# EAGLE board particle-can-v1.1 (EAGLE 7.5.0)
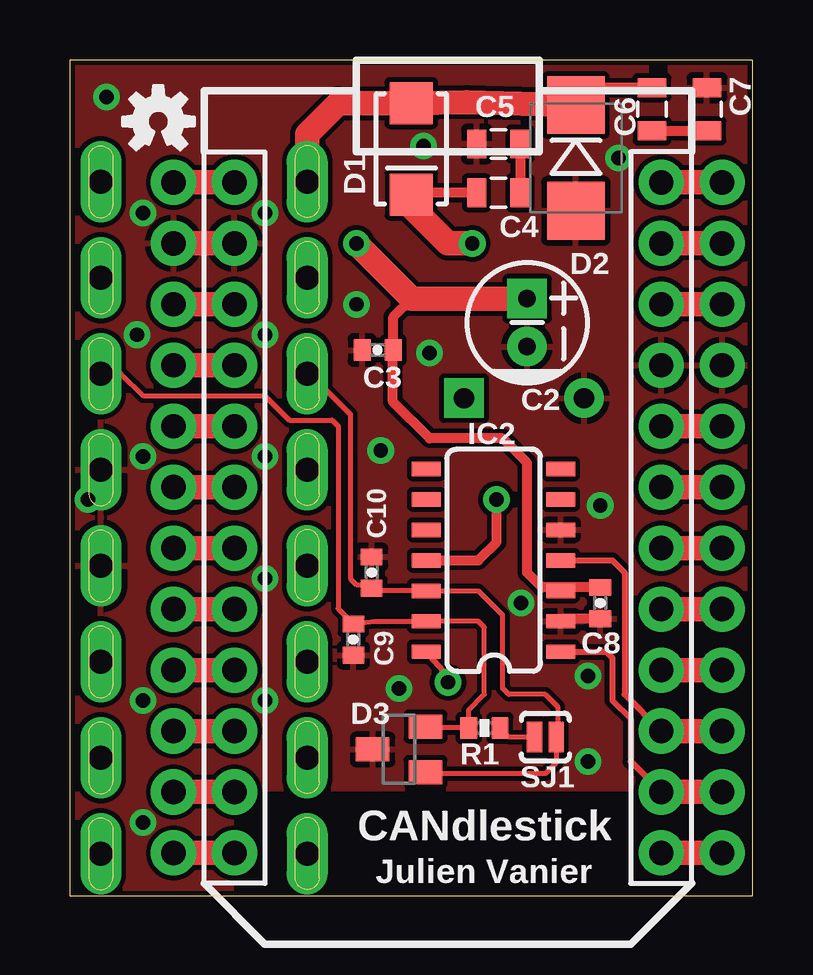
[diagram p0: board, top side]
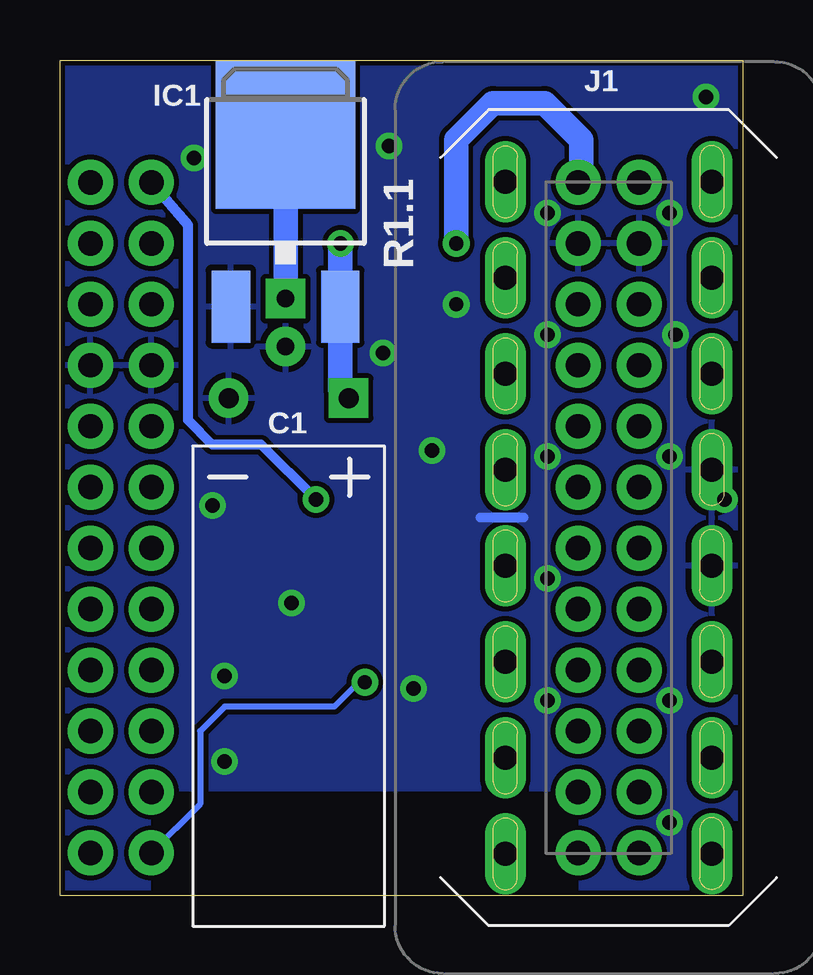
[diagram p1: board, bottom side, seen from below]

Size 28.45 x 34.8 mm. Coordinates in mm from the lower left corner, seen from the top.
Outline: 0,0 28.45,0 28.45,34.8 0,34.8 0,0
Copper layers (1*16): Top 0.035mm / dielectric 1.5mm / Bottom 0.035mm
Design rules "SparkFun *": minimum track width 8mil, minimum drill 20mil, track to track 8mil, track to pad 8mil, pad to pad 8mil, via to via 8mil, smd to smd 8mil, copper to edge 8mil, drill to drill 8mil, minimum pad ring 12mil, minimum via ring 10mil, stop-mask expansion 4mil, vias tented up to drill 45mil, thermal gap 10mil
tRestrict: area 24.1,34.3 to 24.9,34.8; area 6.9,0 to 24.6,4.3
bRestrict: area 6.9,0 to 24.6,4.3

## Footprints (pad centres in the part's own frame; a part is rotated, then mirrored left to right if it is on the bottom)
CPOL-8MMX20MM-FLAT = drill 0.838 pad 1.651: 1 2.5,0 | drill 0.838 pad 1.651 square: 2 -2.5,0
CPOL-5MMX2D = drill 0.737 pad 1.651 square: 1 -1,0 | drill 0.737 pad 1.651: 2 1,0
0402-CAP = smd 0.7 x 0.9: 1 -0.65,0; 2 0.65,0
0805 = smd 0.8 x 1.2: 1 -0.9,0; 2 0.9,0
SPARK_CORE_OUTSIDE = drill 1.016 pad 1.88: 1 -8.89,13.97; 2 -8.89,11.43; 3 -8.89,8.89; 4 -8.89,6.35; 5 -8.89,3.81; 6 -8.89,1.27; 7 -8.89,-1.27; 8 -8.89,-3.81; 9 -8.89,-6.35; 10 -8.89,-8.89; 11 -8.89,-11.43; 12 -8.89,-13.97; 13 8.89,-13.97; 14 8.89,-11.43; 15 8.89,-8.89; 16 8.89,-6.35; 17 8.89,-3.81; 18 8.89,-1.27; 19 8.89,1.27; 20 8.89,3.81; 21 8.89,6.35; 22 8.89,8.89; 23 8.89,11.43; 24 8.89,13.97; @1 -11.43,13.97; @2 -11.43,11.43; @3 -11.43,8.89; @4 -11.43,6.35; @5 -11.43,3.81; @6 -11.43,1.27; @7 -11.43,-1.27; @8 -11.43,-3.81; @9 -11.43,-6.35; @10 -11.43,-8.89; @11 -11.43,-11.43; @12 -11.43,-13.97; @13 11.43,-13.97; @14 11.43,-11.43; @15 11.43,-8.89; @16 11.43,-6.35; @17 11.43,-3.81; @18 11.43,-1.27; @19 11.43,1.27; @20 11.43,3.81; @21 11.43,6.35; @22 11.43,8.89; @23 11.43,11.43; @24 11.43,13.97
SMA-DIODE = smd 1.75 x 1.8: A -1.91,0; C 1.91,0
SMB-DIODE = smd 2.4 x 2.4: A 2.2,0; C -2.2,0
SOT23 = smd 1 x 1.4: 1 -0.95,-1.1; 2 0.95,-1.1; 3 0,1.1
V-REG_DPACK = smd 1.6 x 3: 1 -2.28,-4.8; 3 2.28,-4.8 | smd 5.8 x 6.2: 4 0,2.38
SO14 = smd 0.6 x 1.2: 1 -3.81,-2.8; 2 -2.54,-2.8; 3 -1.27,-2.8; 4 0,-2.8; 5 1.27,-2.8; 6 2.54,-2.8; 7 3.81,-2.8; 8 3.81,2.8; 9 2.54,2.8; 10 1.27,2.8; 11 0,2.8; 12 -1.27,2.8; 13 -2.54,2.8; 14 -3.81,2.8
OBDII-STRAIGHT = drill 1 pad 1.7 long: 1 14,4.3; 2 10,4.3; 3 6,4.3; 4 2,4.3; 5 -2,4.3; 6 -6,4.3; 7 -10,4.3; 8 -14,4.3; 9 14,-4.3; 10 10,-4.3; 11 6,-4.3; 12 2,-4.3; 13 -2,-4.3; 14 -6,-4.3; 15 -10,-4.3; 16 -14,-4.3
0402-RES = smd 0.7 x 0.9: 1 -0.65,0; 2 0.65,0
SJ_2S-NO = smd 0.635 x 1.27: 1 -0.45,0; 2 0.45,0

## Placement (x,y rotation side)
C1  270u  [CPOL-8MMX20MM-FLAT]  18.92,20.73 180 bottom
C2  150u  [CPOL-5MMX2D]  19.05,23.88 270 top
C3  22n  [0402-CAP]  12.83,22.73 180 top
C4  0.1u  [0805]  17.86,29.29 0 top
C5  0.1u  [0805]  17.86,31.32 180 top
C6  0.47u  [0805]  24.26,32.77 270 top
C7  0.47u  [0805]  26.54,32.77 90 top
C8  0.1u  [0402-CAP]  22.1,12.19 90 top
C9  100p  [0402-CAP]  11.81,10.67 270 top
C10  100p  [0402-CAP]  12.57,13.46 90 top
CORE  SPARK_COREOUTSIDE  [SPARK_CORE_OUTSIDE]  15.75,15.75 0 top
D1  RS1J  [SMA-DIODE]  14.22,31.11 270 top
D2  1SMB16CAT3G  [SMB-DIODE]  21.08,30.73 270 top
D3  PESD1CAN  [SOT23]  13.72,6.1 90 top
DRILEGEND  [DRILEGEND]  115.57,24.77 0 top  (outside the outline)
F2  [OSHW-LOGO-S]  3.68,32.26 0 top
IC1  LM340S-50  [V-REG_DPACK]  19.05,29.34 0 bottom
IC2  TJA1048T  [SO14]  17.65,13.97 90 top
J1  OBDII  [OBDII-STRAIGHT]  5.59,15.75 270 bottom
R1  120  [0402-RES]  17.27,6.98 0 top
SJ1  OPEN  [SJ_2S-NO]  19.81,6.6 180 top
ZDRAW1  [A4L-LOC]  -59.94,-55.5 0 top  (outside the outline)

## Library data of the parts
C1 = BUG; PARTNO: EEU-TP1V271LB
C2 = BUG; PARTNO: EKZE160ELL680MF07D
C3 C6 C7 = BUG; PARTNO: CC0805KKX7R9BB474
C4 C9 C10 = BUG; PARTNO: 06035A101JAT2A
C5 = BUG; PARTNO: CC0805KRX7R9BB104
C8 = BUG; PARTNO: CC0603JRX7R7BB104
CORE = Spark; PARTNO: PPPC122LFBN-RC
D1 = BUG; PARTNO: RS1J-E3/5AT; ROLE: Reverse protection
D2 = BUG; PARTNO: 1SMB16CAT3G; ROLE: Overvoltage protection
D3 = BUG; PARTNO: PESD1CAN,215
DRILEGEND = drilegend
F2 = SparkFun-Aesthetics
IC1 = SparkFun-PowerIC; PARTNO: MC7805BDTRKG
IC2 = BUG; PARTNO: TJA1048T,118
J1 = BUG; PARTNO: OBD-II
R1 = BUG; PARTNO: RC0603FR-07120RL
SJ1 = SparkFun-Passives
ZDRAW1 = frames

## Nets
3.3V: CORE.24 CORE.@24 IC2.11
5V: C2.1 C3.1 C8.2 CORE.1 CORE.@1 IC1.4 IC2.3
+12V: C6.1 D1.A D2.C J1.16
CANA_EN: CORE.13 CORE.@13 IC2.14
CANA_RX: CORE.15 CORE.@15 IC2.4
CANA_TX: CORE.14 CORE.@14 IC2.1
GND: C1.1 C2.2 C3.2 C5.2 C7.2 C8.1 C9.2 C10.2 CORE.2 CORE.21 CORE.@2 CORE.@21 D2.A D3.3 IC1.1 IC2.2 IC2.5 J1.4 J1.5
HSPD_HI: C9.1 D3.2 IC2.13 J1.6 R1.1
HSPD_LO: C10.1 D3.1 IC2.12 J1.14 SJ1.1
N$1: R1.2 SJ1.2
N$7: C6.2 C7.1
N$10: CORE.23 CORE.@23
N$11: CORE.22 CORE.@22
N$12: CORE.20 CORE.@20
N$13: CORE.19 CORE.@19
N$14: CORE.18 CORE.@18
N$15: CORE.17 CORE.@17
N$16: CORE.16 CORE.@16
N$17: CORE.12 CORE.@12
N$18: CORE.11 CORE.@11
N$19: CORE.10 CORE.@10
N$20: CORE.9 CORE.@9
N$21: C4.2 C5.1
N$22: C1.2 C4.1 D1.C IC1.3
N$23: CORE.8 CORE.@8
N$24: CORE.7 CORE.@7
N$25: CORE.6 CORE.@6
N$26: CORE.5 CORE.@5
N$27: CORE.4 CORE.@4
N$28: CORE.3 CORE.@3

## Tracks (layer width: path | path; a pad name or v marks a point on that pad's centre or on a via)
3.3V  (via drill 0.6)
  Top 0.406: IC2.11 17.02,13.97 17.78,14.73 v17.78,16.51
  Top 1.016: CORE.@24 CORE.24
  Bottom 0.406: v17.78,16.51 20.07,18.8 22.1,18.8 23.11,19.81 23.11,27.94 CORE.24
5V  (via drill 0.6)
  Top 0.406: 20.32,12.7 IC2.3 20.59,12.84 | 14.24,24.88 13.48,24.11 C3.1 13.46,22.72 13.46,20.57 14.99,19.05 18.03,19.05 19.05,18.03 19.05,13.46 19.67,12.84 20.59,12.84 | C8.2 20.59,12.84
  Top 1.016: CORE.1 CORE.@1 | v11.94,27.18 14.24,24.88 C2.1
  Bottom 1.016: v11.94,27.18 11.94,31.5 10.41,33.02 8.26,33.02 6.73,31.5 6.73,29.85 CORE.1 | IC1.4 C2.1
+12V
  Top 0.406: C6.1 21.98,33.67 21.97,33.66 21.8,33.66 D2.C
  Top 1.016: D2.C 16.55,33.06 D1.A 11.18,33.02 9.89,31.73 J1.16
CANA_EN  (via drill 0.6)
  Top 0.254: IC2.14 15.87,9.01 v15.75,8.89
  Top 1.016: CORE.@13 CORE.13
  Bottom 0.254: v15.75,8.89 16,8.89 17.02,7.87 21.59,7.87 22.61,6.86 22.61,3.81 CORE.13
CANA_RX
  Top 0.254: IC2.4 22.61,13.97 23.11,13.46 23.11,8.38 CORE.15
  Top 1.016: CORE.@15 CORE.15
CANA_TX
  Top 0.203: CORE.14 23.88,4.32
  Top 0.254: IC2.1 22.35,10.16 22.61,9.91 22.61,8.13 23.37,7.37 23.37,5.59 CORE.14
  Top 1.016: CORE.@14 CORE.14
GND  (via drill 0.6)
  Top 0.406: C8.1 20.57,11.54 IC2.2
  Top 1.016: CORE.@2 CORE.2
  Bottom 0.406: 9.14,15.75 10.92,15.75
  other vias: 11.94,24.64 12.95,18.54 2.79,23.37 3.05,28.45 14.99,22.61 22.1,16.26 18.8,12.19 21.59,9.14 21.59,5.59 13.72,8.64 3.05,8.13 3.05,3.05 8.13,8.13 22.86,30.73 8.13,28.45 8.13,23.37 8.13,18.29 1.52,33.27 14.73,31.24 0.76,16.51 3.05,18.29 8.13,13.21
  pour Top (rank 4): 0,0 28.45,0 28.45,34.8 0,34.8
  pour Bottom: 0,0 28.45,0 28.45,34.8 0,34.8
HSPD_HI
  Top 0.203: D3.2 14.88,6.98 R1.1 16.62,7.73 17.27,8.38 17.27,11.18 17.02,11.43 IC2.13 12.7,11.43 C9.1 11.18,11.95 11.18,19.56 10.92,19.81 9.14,19.81 8.13,20.83 3.05,20.83 2.13,21.75 J1.6
HSPD_LO
  Top 0.203: D3.1 14.88,5.08 19.81,5.08 20.26,5.53 SJ1.1 20.32,6.92 20.32,7.87 19.81,8.38 18.29,8.38 18.03,8.64 18.03,11.68 17.02,12.7 IC2.12 12.68,12.7 C10.1 12.43,12.95 11.94,12.95 11.68,13.21 11.68,20.07 10,21.75 J1.14
N$1
  Top 0.203: SJ1.2 18.3,6.6 R1.2
N$7
  Top 0.406: C6.2 C7.1
N$10
  Top 1.016: CORE.@23 CORE.23
N$11
  Top 1.016: CORE.22 CORE.@22
N$12
  Top 1.016: CORE.20 CORE.@20
N$13
  Top 1.016: CORE.@19 CORE.19
N$14
  Top 1.016: CORE.18 CORE.@18
N$15
  Top 1.016: CORE.@17 CORE.17
N$16
  Top 1.016: CORE.@16 CORE.16
N$17
  Top 1.016: CORE.@12 CORE.12
N$18
  Top 1.016: CORE.11 CORE.@11
N$19
  Top 1.016: CORE.@10 CORE.10
N$20
  Top 1.016: CORE.@9 CORE.9
N$21
  Top 0.406: C5.1 C4.2
N$22  (via drill 0.6)
  Top 0.406: C4.1 14.3,29.29 D1.C
  Top 1.016: D1.C 14.22,28.7 15.75,27.18 v16.76,27.18
  Bottom 1.016: v16.76,27.18 IC1.3 16.77,21.07 C1.2
N$23
  Top 1.016: CORE.@8 CORE.8
N$24
  Top 1.016: CORE.@7 CORE.7
N$25
  Top 1.016: CORE.@6 CORE.6
N$26
  Top 1.016: CORE.@5 CORE.5
N$27
  Top 1.016: CORE.@4 CORE.4
N$28
  Top 1.016: CORE.@3 CORE.3

## Text on the board
tPlace: CANdlestick | Julien Vanier
bPlace: R1.1
Document: NOTES: | 1. All dimensions are in Inches unless otherwise specified | 2. Finished board thickness 0.061 inches +/- 0.006" | 3. PCB Construction: Std. 2-layer stackup, 0.5oz CU | 4. Soldermask over bare copper, both sides | 5. Silkscreen on TOP side only, clip from solder lands | 6. Minimum Conductor Width/Spacing: 8mil | 7. PCB Material: FR-4 or equivalent | 8. Files are in Gerber 274X format | 9. Finished PCB Warpage and Twist per IPC-6012 | 10. Layer to layer registration variation +/- 0.005" | 11. Hole size variation +/- 0.004" of the finished drill size | 12. Board outline variation +/- 0.010" of board outline layer | 13. Remove all burrs if present | 14. All through hole components installed on bottom side | 15. Solder on shield of J1 (USB Micro) must not be | wicked into the path of the connector | 16. Ensure J1 (USB Micro) is soldered flush to the PCB | 17. LED1+LED4 must be bent 90 degrees towards edge of PCB, overhang ok | 18. Electrolytic caps to be soldered flush on PCB - no exposed leads | Revision 0.3 | Bug Labs INC. | www.buglabs.net | ENGR: Andrew Tergis | andrew.tergis@buglabs.net
Reference: OBD-II Right-Angle Connector
tAssy: D7 | D6 | D2 | F1 | C10 | C13 | C9 | D8 | D9 | FB1 | D10 | C22 | SJ6 | IC6
bAssy: TP22 | J1 | TP14 | TP23 | TP15 | J4 | C3 | TP5 | TP16 | R25B | TP17\ | LED4 | TP18 | C2 | TP1 | TP2 | J5 | J2 | TP6 | J3 | TP12 | TP21 | TP19 | TP20 | TP3 | LED1 | SJ3 | SJ4 | TP7 | TP4 | TP8 | TP9 | TP10 | TP11 | TP13
DrillLegend: LAYER-STACK
DrillLegend_01-16: 01-16
DrillLegend_01-20: 01-20